# EAGLE board CT_schematic (EAGLE 7.6.0)

Size 100 x 80 mm. Coordinates in mm from the lower left corner, seen from the top.
Outline: 0,0 100,0 100,80 0,80 0,0
Copper layers (1*16): Top 0.035mm / dielectric 1.5mm / Bottom 0.035mm
Design rules "default": minimum track width 10mil, minimum drill 24mil, track to track 8mil, track to pad 8mil, pad to pad 8mil, via to via 8mil, smd to smd 8mil, copper to edge 40mil, drill to drill 8mil, minimum pad ring 10mil, minimum via ring 8mil, stop-mask expansion 4mil, vias tented up to drill 0mil, thermal gap 10mil

## Footprints (pad centres in the part's own frame; a part is rotated, then mirrored left to right if it is on the bottom)
C0603 = smd 0.8 x 0.8: 1 -0.762,0; 2 0.762,0
C0402 = smd 0.5 x 0.5: 1 -0.508,0; 2 0.508,0
C0805 = smd 1.2 x 1.3: 1 -1.016,0; 2 1.016,0
2220 = smd 1.85 x 5.5: 1 -2.55,0; 2 2.55,0
EXV-9H = smd 3.505 x 1.676: 1 -2.857,0; 2 2.857,0
L0603 = smd 0.8 x 0.8: 1 -0.762,0; 2 0.762,0
DR1040 = smd 1.6 x 3.2: 1 -4.458,0; 2 4.458,0
PJ-037B_PACKAGE = drill 3.7 square: 1 12,0 | drill 3.2 square: 2 6,0
R0603 = smd 0.8 x 0.8: 1 -0.762,0; 2 0.762,0
LQFP64 = smd 0.3 x 1.2: 1 -3.75,-5.75; 2 -3.25,-5.75; 3 -2.75,-5.75; 4 -2.25,-5.75; 5 -1.75,-5.75; 6 -1.25,-5.75; 7 -0.75,-5.75; 8 -0.25,-5.75; 9 0.25,-5.75; 10 0.75,-5.75; 11 1.25,-5.75; 12 1.75,-5.75; 13 2.25,-5.75; 14 2.75,-5.75; 15 3.25,-5.75; 16 3.75,-5.75; 33 3.75,5.75; 34 3.25,5.75; 35 2.75,5.75; 36 2.25,5.75; 37 1.75,5.75; 38 1.25,5.75; 39 0.75,5.75; 40 0.25,5.75; 41 -0.25,5.75; 42 -0.75,5.75; 43 -1.25,5.75; 44 -1.75,5.75; 45 -2.25,5.75; 46 -2.75,5.75; 47 -3.25,5.75; 48 -3.75,5.75 | smd 1.2 x 0.3: 17 5.75,-3.75; 18 5.75,-3.25; 19 5.75,-2.75; 20 5.75,-2.25; 21 5.75,-1.75; 22 5.75,-1.25; 23 5.75,-0.75; 24 5.75,-0.25; 25 5.75,0.25; 26 5.75,0.75; 27 5.75,1.25; 28 5.75,1.75; 29 5.75,2.25; 30 5.75,2.75; 31 5.75,3.25; 32 5.75,3.75; 49 -5.75,3.75; 50 -5.75,3.25; 51 -5.75,2.75; 52 -5.75,2.25; 53 -5.75,1.75; 54 -5.75,1.25; 55 -5.75,0.75; 56 -5.75,0.25; 57 -5.75,-0.25; 58 -5.75,-0.75; 59 -5.75,-1.25; 60 -5.75,-1.75; 61 -5.75,-2.25; 62 -5.75,-2.75; 63 -5.75,-3.25; 64 -5.75,-3.75
A2200-A = smd 1.5 x 0.8: 1 -4.85,6.35; 2 -4.85,5.08; 3 -4.85,3.81; 4 -4.85,2.54; 5 -4.85,1.27; 6 -4.85,0; 7 -4.85,-1.27; 8 -4.85,-2.54; 9 -4.85,-3.81; 10 -4.85,-5.08; 11 -4.85,-6.35; 12 4.85,-6.35; 13 4.85,-5.08; 14 4.85,-3.81; 15 4.85,-2.54; 16 4.85,-1.27; 17 4.85,0; 18 4.85,1.27; 19 4.85,2.54; 20 4.85,3.81; 21 4.85,5.08; 22 4.85,6.35 | smd 1.2 x 1.2: 23 -2,2; 24 -2,0; 25 -2,-2; 26 0,-2; 27 0,0; 28 0,2; 29 2,2; 30 2,0; 31 2,-2
COAXIAL_C = smd 1 x 1: 1 0,-1.5; 2 0,1.5 | smd 1.05 x 2.2: 3 -1.475,0; 4 1.475,0
SSOP-28 = smd 1.5 x 0.4: 1 -3.625,4.225; 2 -3.625,3.575; 3 -3.625,2.925; 4 -3.625,2.275; 5 -3.625,1.625; 6 -3.625,0.975; 7 -3.625,0.325; 8 -3.625,-0.325; 9 -3.625,-0.975; 10 -3.625,-1.625; 11 -3.625,-2.275; 12 -3.625,-2.925; 13 -3.625,-3.575; 14 -3.625,-4.225; 15 3.625,-4.225; 16 3.625,-3.575; 17 3.625,-2.925; 18 3.625,-2.275; 19 3.625,-1.625; 20 3.625,-0.975; 21 3.625,-0.325; 22 3.625,0.325; 23 3.625,0.975; 24 3.625,1.625; 25 3.625,2.275; 26 3.625,2.925; 27 3.625,3.575; 28 3.625,4.225
FCI_10118193-0001LF = smd 0.4 x 1.35: 1 -1.3,2.675; 2 -0.65,2.675; 3 0,2.675; 4 0.65,2.675; 5 1.3,2.675 | smd 1.6 x 1.4: 6 -3.2,2.45; 7 3.2,2.45 | smd 1.9 x 1.9: 8 -1.2,0; 9 1.2,0 | hole 0.5: -3.3,0; 3.3,0
ASEK = smd 1.4 x 1: 1 -1.1,-0.8; 2 1.1,-0.8; 3 1.1,0.8; 4 -1.1,0.8
ASFL1 = smd 1.7 x 1.5: 1 -1.27,-1.1; 2 1.27,-1.1; 3 1.27,1.1; 4 -1.27,1.1
IDT74FCT38072 = smd 0.51 x 1: 1 0,0; 2 1.27,0; 3 2.54,0; 4 3.81,0; 5 3.81,4.95; 6 2.54,4.95; 7 1.27,4.95; 8 0,4.95
QFN-16_EP = smd 0.805 x 0.3: 1 -1.452,0.75; 2 -1.452,0.25; 3 -1.452,-0.25; 4 -1.452,-0.75; 9 1.452,-0.75; 10 1.452,-0.25; 11 1.452,0.25; 12 1.452,0.75 | smd 0.3 x 0.805: 5 -0.75,-1.452; 6 -0.25,-1.452; 7 0.25,-1.452; 8 0.75,-1.452; 13 0.75,1.452; 14 0.25,1.452; 15 -0.25,1.452; 16 -0.75,1.452 | smd 1.55 x 1.55: 17 0,0
SON-6 = smd 0.55 x 0.3: 1 -0.355,0.5 | smd 0.52 x 0.3: 2 -0.37,0; 3 -0.37,-0.5; 4 0.37,-0.5; 5 0.37,0; 6 0.37,0.5
SW_4-1437565-2 = smd 1.4 x 2.1: 1 -2.23,4.55; 2 -2.23,-4.55; 3 2.23,4.55; 4 2.23,-4.55
LGM67K-G1J2-24-Z = smd 0.8 x 1.4: A -2,0; C 0,0
NC7SZ125M5X = smd 1.3 x 0.7: 1 -1.3,0.95; 2 -1.3,0; 3 -1.3,-0.95; 4 1.3,-0.95; 5 1.3,0.95

## Placement (x,y rotation side)
C1  1e-07  [C0603]  -15.24,67.31 0 top  (outside the outline)
C2  1e-07  [C0603]  -19.05,67.31 0 top  (outside the outline)
C3  1e-07  [C0603]  -22.86,67.31 0 top  (outside the outline)
C4  1e-07  [C0603]  -26.67,67.31 0 top  (outside the outline)
C5  4.7e-06  [C0603]  -69.85,62.23 0 top  (outside the outline)
C6  1e-07  [C0603]  -30.48,67.31 0 top  (outside the outline)
C7  1e-08  [C0603]  -34.29,67.31 0 top  (outside the outline)
C8  1e-06  [C0603]  -38.1,67.31 0 top  (outside the outline)
C9  1e-07  [C0402]  -26.67,72.39 0 top  (outside the outline)
C10  1e-07  [C0402]  -30.48,72.39 0 top  (outside the outline)
C11  4.7e-06  [C0805]  -52.07,54.61 0 top  (outside the outline)
C12  1e-07  [C0402]  -34.29,72.39 0 top  (outside the outline)
C13  1e-07  [C0402]  -38.1,72.39 0 top  (outside the outline)
C14  1e-07  [C0402]  -41.91,72.39 0 top  (outside the outline)
C15  4.7e-06  [C0805]  -57.15,54.61 0 top  (outside the outline)
C16  1e-07  [C0402]  -45.72,72.39 0 top  (outside the outline)
C17  1e-07  [C0402]  -49.53,72.39 0 top  (outside the outline)
C18  1e-08  [C0402]  -53.34,72.39 0 top  (outside the outline)
C19  1e-08  [C0402]  -57.15,72.39 0 top  (outside the outline)
C20  1e-08  [C0402]  -60.96,72.39 0 top  (outside the outline)
C21  1e-08  [C0402]  -64.77,72.39 0 top  (outside the outline)
C22  1e-05  [C0805]  -62.23,54.61 0 top  (outside the outline)
C23  1e-06  [C0603]  -41.91,67.31 0 top  (outside the outline)
C24  1e-07  [C0402]  -68.58,72.39 0 top  (outside the outline)
C25  6.8e-05  [2220]  -67.31,24.13 0 top  (outside the outline)
C26  1e-07  [C0402]  -72.39,72.39 0 top  (outside the outline)
C27  0.0001  [EXV-9H]  -67.31,46.99 0 top  (outside the outline)
C28  0.0001  [EXV-9H]  -17.78,55.88 0 top  (outside the outline)
C29  1e-08  [C0402]  -15.24,77.47 0 top  (outside the outline)
C30  1e-08  [C0402]  -19.05,77.47 0 top  (outside the outline)
F1  240.0  [L0603]  -45.72,67.31 0 top  (outside the outline)
I1  3.8e-06  [DR1040]  -57.15,25.4 0 top  (outside the outline)
J1  PJ-037B  [PJ-037B_PACKAGE]  -66.04,7.62 0 top  (outside the outline)
R2  1000.0  [R0603]  -49.53,67.31 0 top  (outside the outline)
R4  4700.0  [R0603]  -53.34,67.31 0 top  (outside the outline)
R5  4700.0  [R0603]  -57.15,67.31 0 top  (outside the outline)
R6  2200.0  [R0603]  -60.96,67.31 0 top  (outside the outline)
R7  2200.0  [R0603]  -64.77,67.31 0 top  (outside the outline)
R8  10000.0  [R0603]  -20.32,62.23 0 top  (outside the outline)
R9  10000.0  [R0603]  -25.4,62.23 0 top  (outside the outline)
R10  4700.0  [R0603]  -68.58,67.31 0 top  (outside the outline)
R11  10000.0  [R0603]  -30.48,62.23 0 top  (outside the outline)
R12  10000.0  [R0603]  -35.56,62.23 0 top  (outside the outline)
R13  4700.0  [R0603]  -72.39,67.31 0 top  (outside the outline)
R14  10000.0  [R0603]  -40.64,62.23 0 top  (outside the outline)
R15  10000.0  [R0603]  -45.72,62.23 0 top  (outside the outline)
R16  20000.0  [R0603]  -50.8,62.23 0 top  (outside the outline)
R17  91000.0  [R0603]  -55.88,62.23 0 top  (outside the outline)
R18  300000.0  [R0603]  -67.31,54.61 0 top  (outside the outline)
R19  10000.0  [R0603]  -60.96,62.23 0 top  (outside the outline)
R20  10000.0  [R0603]  -66.04,62.23 0 top  (outside the outline)
R21  9100.0  [R0603]  -15.24,72.39 0 top  (outside the outline)
R22  680000.0  [R0603]  -72.39,54.61 0 top  (outside the outline)
R23  120000.0  [R0603]  -15.24,62.23 0 top  (outside the outline)
U1  STM32L151R6T6A  [LQFP64]  -25.4,26.67 0 top  (outside the outline)
U2  A2200-A  [A2200-A]  -19.05,10.16 0 top  (outside the outline)
U3  73412-0114  [COAXIAL_C]  -21.59,46.99 0 top  (outside the outline)
U4  FT232RL-REEL  [SSOP-28]  -33.02,7.62 0 top  (outside the outline)
U5  10118193-0001LF  [FCI_10118193-0001LF]  -52.07,36.83 0 top  (outside the outline)
U6  FT232RL-REEL  [SSOP-28]  -45.72,7.62 0 top  (outside the outline)
U7  10118193-0001LF  [FCI_10118193-0001LF]  -62.23,36.83 0 top  (outside the outline)
U8  ASEK-32.768KHz-ECST  [ASEK]  -58.42,46.99 0 top  (outside the outline)
U9  ASFL1-12MHZ-NCS  [ASFL1]  -26.67,38.1 0 top  (outside the outline)
U10  idt74fct38072  [IDT74FCT38072]  -40.64,44.45 0 top  (outside the outline)
U11  ASFL1-25MHZ-NCS  [ASFL1]  -43.18,38.1 0 top  (outside the outline)
U12  LTC3601EUD#PBF  [QFN-16_EP]  -20.32,72.39 0 top  (outside the outline)
U13  TPS3895ADRYR  [SON-6]  -21.59,76.2 0 top  (outside the outline)
U14  4-1437565-2  [SW_4-1437565-2]  -46.99,25.4 0 top  (outside the outline)
U15  Q65110A2395  [LGM67K-G1J2-24-Z]  -27.94,54.61 0 top  (outside the outline)
U16  nc7sz125m5x  [NC7SZ125M5X]  -39.37,53.34 0 top  (outside the outline)
U17  nc7sz125m5x  [NC7SZ125M5X]  -45.72,53.34 0 top  (outside the outline)

## Library data of the parts
C1-C30 F1 I1 J1 R2 R4-R23 U1-U17 = circuit_tree

## Nets
CLK_U1_3: U1.3 U8.3
CLK_U1_5: U1.5 U11.3
CLK_U4_27: U4.27 U10.7
CLK_U6_27: U6.27 U10.6
CLK_U10_3: U9.3 U10.3
GND: C1.2 C2.2 C3.2 C4.2 C5.2 C6.2 C7.2 C8.2 C9.2 C10.2 C11.2 C12.2 C13.2 C14.2 C15.2 C16.2 C17.2 C18.2 C19.2 C20.2 C21.2 C22.2 C23.2 C25.1 C25.2 C26.2 C27.2 C28.2 C29.2 C30.2 J1.2 R2.2 R8.2 R12.2 R15.2 R16.2 R18.2 R21.2 R23.2 U1.12 U1.18 U1.31 U1.47 U1.63 U2.7 U2.8 U2.23 U2.24 U2.25 U2.26 U2.27 U2.28 U2.29 U2.30 U2.31 U4.7 U4.18 U4.21 U4.25 U4.26 U5.5 U5.6 U5.7 U5.8 U5.9 U6.7 U6.18 U6.21 U6.25 U6.26 U7.5 U7.6 U7.7 U7.8 U7.9 U8.2 U9.2 U10.4 U10.5 U10.8 U11.2 U12.1 U12.9 U12.17 U13.2 U15.C U16.1 U16.3 U17.1 U17.3
NET_U1_1: C6.1 U1.1
NET_U1_7: R5.1 U1.7 U17.4
NET_U1_13: C7.1 C8.1 F1.1 U1.13
NET_U1_58: R6.1 U1.58 U2.15
NET_U1_59: R7.1 U1.59 U2.16
NET_U1_60: R8.1 U1.60
NET_U1_61: U15.A
NET_U1_62: U14.3 U14.4
NET_U2_2: R9.2 U2.2
NET_U2_6: U2.6
NET_U2_17: R9.1 U2.17
NET_U2_19: U2.19
NET_U2_22: R4.1 U2.22 U16.4
NET_U3_1: U2.11 U3.1
NET_U3_2: U2.10 U3.2 U3.3 U3.4
NET_U4_14: R11.1 U4.14
NET_U4_17: C12.1 U4.17
NET_U4_19: R12.1 U4.19
NET_U5_1: R10.1 U5.1
NET_U5_2: U4.16 U5.2
NET_U5_3: U4.15 U5.3
NET_U5_19: R10.2
NET_U6_14: R14.1 U6.14
NET_U6_17: C16.1 U6.17
NET_U6_19: R15.1 U6.19
NET_U7_1: R13.1 U7.1
NET_U7_2: U6.16 U7.2
NET_U7_3: U6.15 U7.3
NET_U7_19: R13.2
NET_U12_3: C24.2 I1.1 U12.3 U12.4
NET_U12_6: C24.1 U12.6
NET_U12_7: C23.1 U12.7 U12.12
NET_U12_10: R18.1 U12.10
NET_U12_11: R16.1 R17.1 U12.11
NET_U12_14: U12.14
NET_U12_ATNET_3: I1.2 R17.2
NET_U13_1: R20.1 R21.1 U13.1
NET_U13_3: R22.2 R23.1 U13.3
NET_U13_4: R19.1 U13.4 U16.2 U17.2
NET_U14_1: R2.1 U14.1 U14.2
PROC_USART1_CTS: U1.44 U4.3
PROC_USART1_RTS: U1.45 U4.11
PROC_USART1_RX: U1.43 U4.1
PROC_USART1_TX: U1.42 U4.5
PROC_USART2_CTS: U1.14 U6.3
PROC_USART2_RTS: U1.15 U6.11
PROC_USART2_RX: U1.17 U6.1
PROC_USART2_TX: U1.16 U6.5
VCC_S1_7V0: C22.1 C27.1 C28.1 J1.1 U12.15 U12.16
VCC_TIER1_3V3: C1.1 C2.1 C3.1 C4.1 C5.1 C9.1 C10.1 C11.1 C13.1 C14.1 C15.1 C17.1 C18.1 C19.1 C20.1 C21.1 C25.2 C26.1 C29.1 C30.1 F1.2 I1.2 R4.2 R5.2 R6.2 R7.2 R11.2 R14.2 R17.2 R19.2 R20.2 R22.1 U1.19 U1.32 U1.48 U1.64 U2.20 U4.4 U4.20 U6.4 U6.20 U8.4 U9.4 U10.1 U10.2 U11.4 U12.8 U13.6 U16.5 U17.5

## Tracks (layer width: path | path; a pad name or v marks a point on that pad's centre or on a via)
CLK_U1_3  (1 unrouted)
CLK_U1_5  (1 unrouted)
CLK_U4_27  (1 unrouted)
CLK_U6_27  (1 unrouted)
CLK_U10_3  (1 unrouted)
GND  (89 unrouted)
NET_U1_1  (1 unrouted)
NET_U1_7  (2 unrouted)
NET_U1_13  (3 unrouted)
NET_U1_58  (2 unrouted)
NET_U1_59  (2 unrouted)
NET_U1_60  (1 unrouted)
NET_U1_62  (1 unrouted)
NET_U2_2  (1 unrouted)
NET_U2_17  (1 unrouted)
NET_U2_22  (2 unrouted)
NET_U3_1  (1 unrouted)
NET_U3_2  (3 unrouted)
NET_U4_14  (1 unrouted)
NET_U4_17  (1 unrouted)
NET_U4_19  (1 unrouted)
NET_U5_1  (1 unrouted)
NET_U5_2  (1 unrouted)
NET_U5_3  (1 unrouted)
NET_U6_14  (1 unrouted)
NET_U6_17  (1 unrouted)
NET_U6_19  (1 unrouted)
NET_U7_1  (1 unrouted)
NET_U7_2  (1 unrouted)
NET_U7_3  (1 unrouted)
NET_U12_3  (3 unrouted)
NET_U12_6  (1 unrouted)
NET_U12_7  (2 unrouted)
NET_U12_10  (1 unrouted)
NET_U12_11  (2 unrouted)
NET_U12_ATNET_3  (1 unrouted)
NET_U13_1  (2 unrouted)
NET_U13_3  (2 unrouted)
NET_U13_4  (3 unrouted)
NET_U14_1  (2 unrouted)
PROC_USART1_CTS  (1 unrouted)
PROC_USART1_RTS  (1 unrouted)
PROC_USART1_RX  (1 unrouted)
PROC_USART1_TX  (1 unrouted)
PROC_USART2_CTS  (1 unrouted)
PROC_USART2_RTS  (1 unrouted)
PROC_USART2_RX  (1 unrouted)
PROC_USART2_TX  (1 unrouted)
VCC_S1_7V0  (5 unrouted)
VCC_TIER1_3V3  (49 unrouted)